# Altium PCB PCB1.PcbDoc
Units mil, origin at the board's own origin, x right, y up, seen from the top; angles counter-clockwise.
Board outline 6000 x 4000 mil, 3 copper layers (Top Layer, PWR, Bottom Layer), stack 19.217 mil thick; 82 components, 43 nets, 260 pads, 0 vias.
Unrouted connection lines stored in the file: 128.
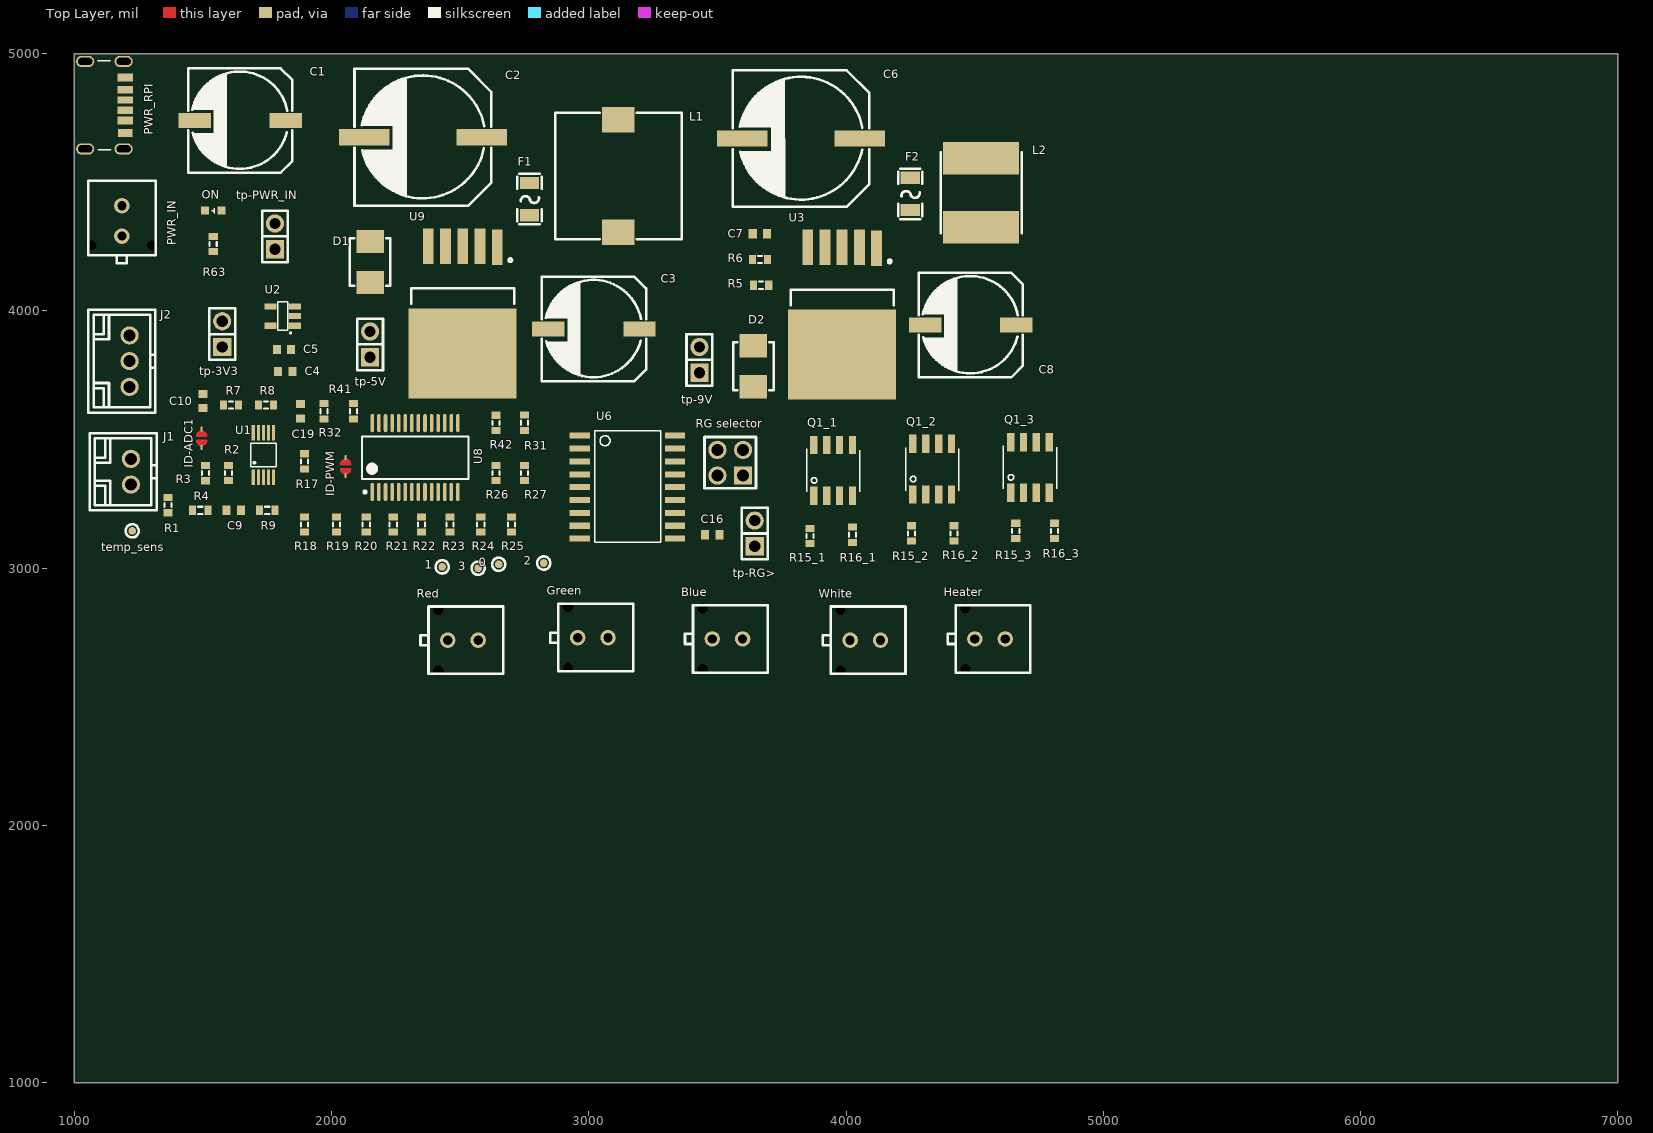
[diagram p0: Top Layer view]
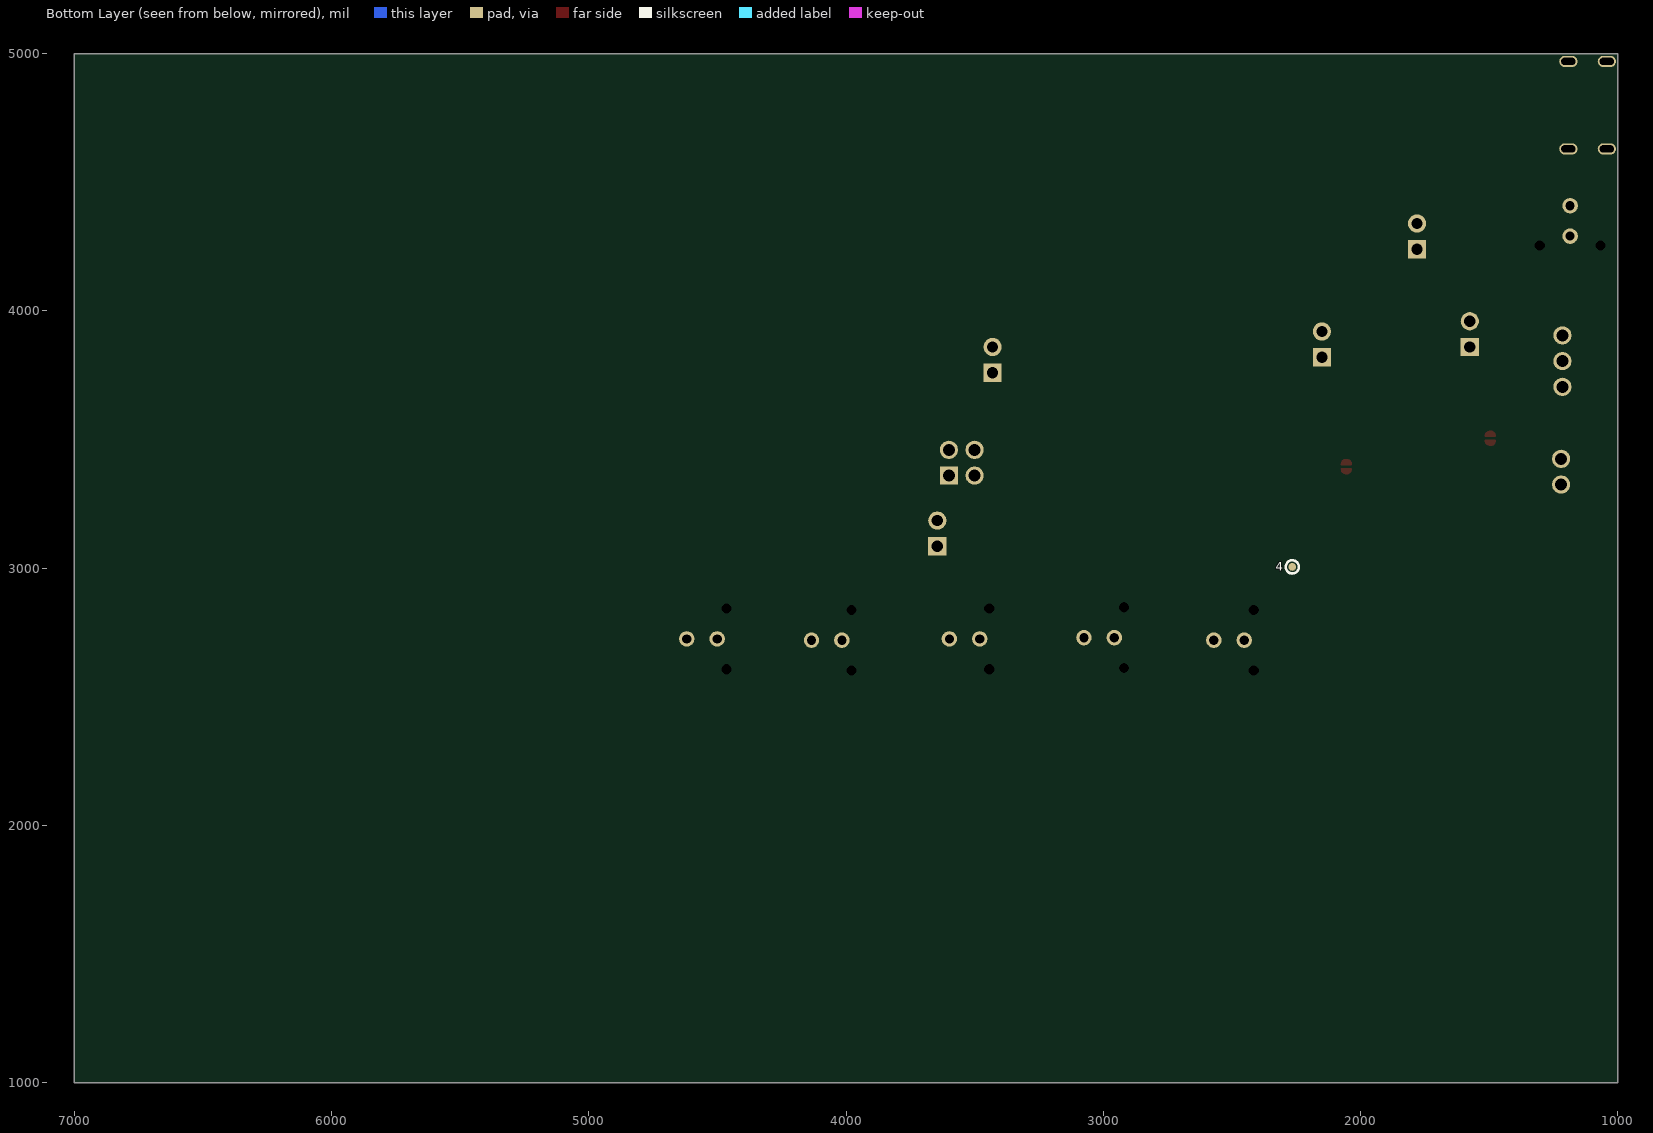
[diagram p1: Bottom Layer view, seen from below]

## Layer stack, top to bottom
Top Solder: solder mask 0.4, Solder Resist, Dk 3.5
Top Layer: signal copper 1.4
Dielectric 1: core 10, FR-4, Dk 4.2
PWR: signal copper 1.417
Dielectric 2: prepreg 5, Dk 4.2
Bottom Layer: signal copper 1.4
Bottom Solder: solder mask 0.4, Solder Resist, Dk 3.5

## Board outline
1000,1000 7000,1000 7000,5000 1000,5000

## Design rules (kind name [scope] priority, off if disabled: settings)
Clearance [All] p1: gap=5 ignorepadtopadclearanceinfootprint=FALSE
HoleSize [All] p1: absolutevalues=TRUE maxlimit=137.79 minlimit=1 maxpercent=80.000 minpercent=20.000
HoleToHoleClearance [All] p1: gap=22 allowstackedmicrovias=TRUE
MinimumSolderMaskSliver [All] p1: minsoldermaskwidth=0
PolygonConnect [All] p1: connectstyle=Relief reliefconductorwidth=10 reliefentries=4 polygonreliefangle="90 Angle" airgapwidth=10
RoomDefinition Step-Down [InComponentClass('Step-Down')] p1: confinementstyle=ConfineOut formatcopy=TRUE lockcomponents=FALSE outline 7045,3835 14720,3835 14720,4620 7045,4620
RoomDefinition Salidas [InComponentClass('Salidas')] p2: confinementstyle=ConfineOut formatcopy=TRUE lockcomponents=FALSE outline 7050,2650 10265,2650 10265,3170 7050,3170
RoomDefinition "Generador PWM" [InComponentClass('Generador PWM')] p3: confinementstyle=ConfineOut formatcopy=TRUE lockcomponents=FALSE outline 7085,3280 12365,3280 12365,3820 7085,3820
RoomDefinition Entradas [InComponentClass('Entradas')] p4: confinementstyle=ConfineOut formatcopy=TRUE lockcomponents=FALSE outline 7045,1435 9550,1435 9550,1965 7045,1965
RoomDefinition Drivers [InComponentClass('Drivers')] p5: confinementstyle=ConfineOut formatcopy=TRUE lockcomponents=FALSE outline 7065,2060 8825,2060 8825,2630 7065,2630
RoomDefinition ADC [InComponentClass('ADC')] p6: confinementstyle=ConfineOut formatcopy=TRUE lockcomponents=FALSE outline 7050,1015 9425,1015 9425,1375 7050,1375
RoomDefinition 3 [InComponentClass('3')] p7: confinementstyle=ConfineOut formatcopy=TRUE lockcomponents=FALSE outline 9435,5250 10360,5250 10360,5650 9435,5650
RoomDefinition 2 [InComponentClass('2')] p8: confinementstyle=ConfineOut formatcopy=TRUE lockcomponents=FALSE outline 7125,5270 8050,5270 8050,5670 7125,5670
RoomDefinition 1 [InComponentClass('1')] p9: confinementstyle=ConfineOut formatcopy=TRUE lockcomponents=FALSE outline 7150,4755 8020,4755 8020,5155 7150,5155
RoutingVias [All] p1: holewidth=28 width=50 viastyle="Through Hole" minholewidth=28 minwidth=50 maxholewidth=28 maxwidth=50
SilkToSilkClearance [All] p1: silktosilkclearance=6
SilkToSolderMaskClearance [IsPad] p1: minsilkscreentomaskgap=0 clearancetoexposedcopper=TRUE
SolderMaskExpansion [All] p1: expansion=4
Width [All] p1: maxlimit=60 minlimit=5 preferedwidth=10
25 further rules are at their usual default settings.

## Classes and differential pairs
component class 1: Q1_1 R15_1 R16_1
component class 2: Q1_2 R15_2 R16_2
component class 3: Q1_3 R15_3 R16_3
component class ADC: C9 C10 ID-ADC1 R2 R3 R4 R7 R8 R9 temp_sens U1
component class Drivers: C16 "RG selector" tp-RG> U6
component class Entradas: C1 J1 J2 PWR_IN R1 tp-PWR_IN
component class "Generador PWM": 0 1 2 3 4 C19 ID-PWM R17 R18 R19 R20 R21 R22 R23 R24 R25 R26 R27 R31 R32 R41 R42 U8
component class Salidas: Blue Green Heater PWR_RPI Red White
component class Step-Down: C2 C3 C4 C5 C6 C7 C8 D1 D2 F1 F2 L1 L2 ON R5 R6 R63 tp-3V3 tp-5V tp-9V U2 U3 U9
channel class HighCurrentDriver: 1 2 3

## Components (designator, comment, footprint, x,y, rotation, side; value= is the part's Value field where it differs from the comment)
0 "TP" TP 2650,3015 r90 top
1 "TP" TP 2430,3005 r90 top
2 "TP" TP 2825,3020 r90 top
3 "TP" TP 2570,3000 r90 top
4 "TP" TP 2265,3005 r90 bottom
Blue "Power connector 2x1" CONN-TH_430450212 3539.06,2725 r0 top
C1 "Cap pol" CAP_SMD_Electrolytic_10x10 1645,4740 r180 top value=47uF
C2 "Cap pol" CAP_SMD_Electrolytic_13.5x13.5 2355,4675 r180 top value=680uF
C3 "Cap pol" CAP_SMD_Electrolytic_10x10 3020,3930 r180 top value=330uF
C4 "Cap Semi" 1608[0603] 1820,3765 r0 top value=1uF
C5 "Cap Semi" 1608[0603] 1815,3850 r0 top value=1uF
C6 "Cap pol" CAP_SMD_Electrolytic_13.5x13.5 3825,4670 r180 top value=680uF
C7 "Cap Semi" 1608[0603] 3665,4300 r0 top value=1.5nF
C8 "Cap pol" CAP_SMD_Electrolytic_10x10 4485,3945 r180 top value=330uF
C9 "Cap Semi" 1608[0603] 1620,3225 r0 top value=100nF
C10 "Cap Semi" 1608[0603] 1500,3650 r90 top value=100nF
C16 "Cap Semi" 1608[0603] 3480,3130 r180 top value=1uF
C19 "Cap Semi" 1608[0603] 1880,3610 r90 top value=10uF
D1 "Schottky Diode" SMB_L4.6-W3.6-LS5.3-RD 2150,4190 r90 top
D2 "Schottky Diode" SMB_L4.6-W3.6-LS5.3-RD 3640,3785 r90 top
F1 "Generic Fuse" F1206 2770,4435 r90 top
F2 "Generic Fuse" F1206 4250,4455 r90 top
Green "Power connector 2x1" CONN-TH_430450212 3015.94,2730 r0 top
Heater "Power connector 2x1" CONN-TH_430450212 4560,2725 r0 top
ID-ADC1 "sj" SJ2 1495,3505 r90 top
ID-PWM "sj" SJ2 2055,3395 r90 top
J1 "Generic header 2x1" CONN-TH_A2547WV-2P 1204.25,3374.02 r270 top
J2 "Generic Header 3x1" CONN-TH_A2547WV-3P 1215,3805 r270 top
L1 "Inductor" IND-SMD_L12.5-W12.5_SMDRS1275 3115,4525 r90 top value=33uH
L2 "Inductor" IND-SMD_L8.0-W8.0 4525,4460 r90 top value=15uH
ON "Generic LED" LED0603 1540,4390 r0 top
PWR_IN "Power connector 2x1" CONN-TH_430450212 1185,4350 r90 top
PWR_RPI "USB-C female 6" "USB-C_SMD 6 contacts" 1120,4800 r0 top
Q1_1 "IRF7401PbF-1" SOIC8 3950,3380 r0 top (schematic designator Q1)
Q1_2 "IRF7401PbF-1" SOIC8 4335,3385 r0 top (schematic designator Q1)
Q1_3 "IRF7401PbF-1" SOIC8 4715,3391.57 r0 top (schematic designator Q1)
R1 "Res3" J1-0603 1365,3245 r90 top value=10K
R2 "Res3" J1-0603 1600,3370 r90 top value=2K
R3 "Res3" J1-0603 1510,3369.53 r90 top value=10K
R4 "Res3" J1-0603 1489.53,3225 r0 top value=2K
R5 "Res3" J1-0603 3670,4100 r0 top value=1K
R6 "Res3" J1-0603 3665.47,4200 r0 top value=6.34K
R7 "Res3" J1-0603 1609.53,3635 r0 top value=10K
R8 "Res3" J1-0603 1745,3635 r0 top value=10K
R9 "Res3" J1-0603 1750,3225 r0 top value=220
R15_1 "Res3" J1-0603 3860,3125 r90 top value=110 (schematic designator R15)
R15_2 "Res3" J1-0603 4255,3135.47 r90 top value=110 (schematic designator R15)
R15_3 "Res3" J1-0603 4660,3145 r90 top value=110 (schematic designator R15)
R16_1 "Res3" J1-0603 4025,3130 r90 top value=10K (schematic designator R16)
R16_2 "Res3" J1-0603 4420,3135.47 r90 top value=10K (schematic designator R16)
R16_3 "Res3" J1-0603 4810,3145 r90 top value=10K (schematic designator R16)
R17 "Res3" J1-0603 1895,3415.47 r90 top value=2K
R18 "Res3" J1-0603 1895,3170 r90 top value=10K
R19 "Res3" J1-0603 2020,3170 r90 top value=10K
R20 "Res3" J1-0603 2135,3170 r90 top value=2K
R21 "Res3" J1-0603 2240,3170 r90 top value=2K
R22 "Res3" J1-0603 2350,3170 r90 top value=2K
R23 "Res3" J1-0603 2460,3170 r90 top value=220
R24 "Res3" J1-0603 2580,3170 r90 top value=220
R25 "Res3" J1-0603 2700,3170 r90 top value=220
R26 "Res3" J1-0603 2640,3370 r90 top value=220
R27 "Res3" J1-0603 2750,3370 r90 top value=220
R31 "Res3" J1-0603 2750,3565.47 r90 top value=2K
R32 "Res3" J1-0603 1970,3610 r90 top value=2K
R41 "Res3" J1-0603 2085,3610 r90 top value=10K
R42 "Res3" J1-0603 2640,3565 r90 top value=10K
R63 "Res3" J1-0603 1540,4260 r90 top value=442
Red "Power connector 2x1" CONN-TH_430450212 2510.94,2720 r0 top
"RG selector" "Pin Header 2x2c" HDR-TH_4P-P2.54-V-R2-C2-S2.54_A2541WV-2X2P 3550,3410 r90 top
temp_sens "TP" TP 1225,3145 r90 top (schematic designator temp_sens1)
tp-3V3 "Pin Header 2x1" HDR-TH_P2.54-H-M_A2541WV-2P 1575,3910 r90 top
tp-5V "Pin Header 2x1" HDR-TH_P2.54-H-M_A2541WV-2P 2150,3870 r90 top
tp-9V "Pin Header 2x1" HDR-TH_P2.54-H-M_A2541WV-2P 3430,3810 r90 top
tp-PWR_IN "Pin Header 2x1" HDR-TH_P2.54-H-M_A2541WV-2P 1780,4290 r90 top
tp-RG> "Pin Header 2x1" HDR-TH_P2.54-H-M_A2541WV-2P 3645,3135 r90 top
U1 "ADS1115" "VSSOP - 10" 1735,3440 r0 top
U2 "AP2112K-3.3TRG1" SOT25-5 1810,3980 r270 top
U3 "LM2596-ADJ" TO-263-5 3985,4038.66 r90 top
U6 "ULN2803A" SOIC18 2964.92,3515 r0 top
U8 "PCA9685" SSOP-28_L 2325,3430 r90 top
U9 "LM2596-5V" TO-263-5 2510,4043.66 r90 top
White "Power connector 2x1" CONN-TH_430450212 4075,2720 r0 top

## Footprints (in the part's own frame and the unit in brackets; to place one, negate y for a bottom-side part, rotate by r counter-clockwise, add the part's x,y. Pads: shape width x height; smd on the part's side, far side on the other; paste and mask are expansions set on the pad)
1608[0603] [mm] "Chip Capacitor, Body 1.6x0.8mm, IPC High Density"
  rect 0.8x0.9 smd: 1(-0.7,0) 2(0.7,0)
  body extent -0.87,-0.48 0.87,0.48, height 1.3
CAP_SMD_Electrolytic_10x10 [mm]
  rect 3.2x1.5 smd: 1(4.5,0) 2(-4.5,0)
  silkscreen extent -5.15,-5.15 5.15,5.15, body extent -6,-5.25 6,5.25, height 10.5
CAP_SMD_Electrolytic_13.5x13.5 [mm]
  rect 5x1.6 smd: 1(5.8,0) 2(-5.8,0)
  silkscreen extent -6.75,-6.75 6.75,6.75, body extent -7.35,-6.75 7.55,6.75, height 13.5
CONN-TH_430450212 [mm]
  round 1.524 hole 0.914: 1(-1.5,0) 2(1.5,0)
  round 0.5 hole 1: 3(-2.44,3) 4(-2.44,-3)
  silkscreen extent -4.19,-3.32 3.97,3.32, body extent -4.73,-3.6 4.03,3.55, height 9.95
CONN-TH_A2547WV-2P [mm]
  round 1.8 hole 1.2: 1(-1.295,0.4) 2(1.245,0.4)
  silkscreen extent -3.84,-3.66 3.78,2.94, body extent -3.71,-3.71 3.66,2.89, height 11.81
CONN-TH_A2547WV-3P [mm]
  round 1.8 hole 1.2: 1(-2.54,0) 2(0,0) 3(2.54,0)
  silkscreen extent -5.08,-4.07 5.08,2.54, body extent -5.08,-4.04 5.08,2.56, height 11.81
F1206 [mm]
  rect 1.2x1.9 smd: 1(-1.6,0) 2(1.6,0)
  silkscreen extent -2.5,-1.2 2.5,1.2, body extent -1.7,-0.89 1.7,0.89, height 0.84
HDR-TH_4P-P2.54-V-R2-C2-S2.54_A2541WV-2X2P [mm]
  rect 1.8x1.8 hole 1.2: 1(-1.27,-1.27)
  round 1.8 hole 1.2: 2(-1.27,1.27) 3(1.27,-1.27) 4(1.27,1.27)
  silkscreen extent -2.54,-2.54 2.54,2.54, body extent -2.54,-2.5 2.54,2.5, height 8.6
HDR-TH_P2.54-H-M_A2541WV-2P [mm]
  rect 1.8x1.8 hole 1.1: 1(-1.27,0)
  round 1.8 hole 1.1: 2(1.27,0)
  silkscreen extent -2.54,-1.27 2.54,1.27, body extent -2.46,-1.16 2.62,1.24, height 8.36
IND-SMD_L8.0-W8.0 [mm]
  rect 3.2x7.5 smd: 1(-3.4,0) 2(3.4,0)
  silkscreen extent -4,-4 4,4, body extent -4.1,-4 3.9,4, height 4
IND-SMD_L12.5-W12.5_SMDRS1275 [mm]
  rect 2.5x3.2 smd: 1(-5.55,0) 2(5.55,0)
  silkscreen extent -6.25,-6.25 6.25,6.25, body extent -6.25,-6.25 6.25,6.25, height 7.8
J1-0603 [mm] "Chip Resistor, Body 1.6x0.8mm, IPC High Density"
  rect 0.7x0.9 smd: 1(-0.75,0) 2(0.75,0)
  silkscreen extent -0.2,-0.35 0.2,0.35, body extent -0.85,-0.48 0.85,0.48, height 0.9
LED0603 [mm] "LED 0603"
  rect 0.8x0.8 smd: 1(-0.8,0) 2(0.8,0)
  silkscreen extent -0.13,-0.25 0.13,0.25, body extent -0.8,-0.4 0.8,0.4, height 0.4
SJ2 [mm]
  oval 0.5x0.2 smd: 1(-0.9,0) 2(0.9,0)
  Top Layer region: -0.238,-0.491 -0.455,-0.442 -0.629,-0.303 -0.726,-0.103 -0.726,0.12 -0.629,0.32 -0.455,0.459 -0.238,0.509 -0.238,0.509
  Top Layer region: 0.2,-0.5 0.417,-0.45 0.591,-0.312 0.687,-0.111 0.687,0.111 0.591,0.312 0.417,0.45 0.2,0.5 0.2,0.5
  Top Layer lines w0.127: -0.2,0.5 ccw(c-0.2,0) -0.2,-0.5 -0.2,0.5 ; 0.2,0.5 cw(c0.2,0) 0.2,-0.5 0.2,0.5
SMB_L4.6-W3.6-LS5.3-RD [mm]
  rect 2.29x2.72 smd: 1(-2.025,0) 2(2.025,0)
  silkscreen extent -2.35,-2 2.35,2, body extent -2.79,-1.97 2.8,1.97, height 2.5
SOIC8 [mm]
  rect 0.72x1.8 smd: 1(-1.905,-2.5) 2(-0.635,-2.5) 3(0.635,-2.5) 4(1.905,-2.5) 5(1.905,2.5) 6(0.635,2.5) 7(-0.635,2.5) 8(-1.905,2.5)
  silkscreen extent -2.63,-2.12 2.63,2.12, body extent -2.5,-3.08 2.5,3.08, height 2
SOIC18 [mm]
  rect 2x0.6 smd: 1(0,0) 2(0,-1.27) 3(0,-2.54) 4(0,-3.81) 5(0,-5.08) 6(0,-6.35) 7(0,-7.62) 8(0,-8.89) 9(0,-10.16) 10(9.4,-10.16) 11(9.4,-8.89) 12(9.4,-7.62) 13(9.4,-6.35) 14(9.4,-5.08) 15(9.4,-3.81) 16(9.4,-2.54) 17(9.4,-1.27) 18(9.4,0)
  silkscreen extent 1.5,-10.5 8,0.5, body extent -0.48,-10.88 9.83,0.68, height 2.64
SOT25-5 [mm]
  rect 0.6x1.2 smd: 1(0.95,1.2) 2(0,1.2) 3(-0.95,1.2) 4(-0.95,-1.2) 5(0.95,-1.2)
  silkscreen extent -1.4,-0.5 1.68,0.81, body extent -1.55,-1.47 1.55,1.53, height 1.45
SSOP-28_L [mm] "SOP, 28-Leads, Body 10.2x5.3mm, Pitch 0.65mm, IPC High Density"
  oval 1.8x0.35 smd: 1(-3.4,4.225) 2(-3.4,3.575) 3(-3.4,2.925) 4(-3.4,2.275) 5(-3.4,1.625) 6(-3.4,0.975) 7(-3.4,0.325) 8(-3.4,-0.325) 9(-3.4,-0.975) 10(-3.4,-1.625) 11(-3.4,-2.275) 12(-3.4,-2.925) 13(-3.4,-3.575) 14(-3.4,-4.225) 15(3.4,-4.225) 16(3.4,-3.575) 17(3.4,-2.925) 18(3.4,-2.275) 19(3.4,-1.625) 20(3.4,-0.975) 21(3.4,-0.325) 22(3.4,0.325) 23(3.4,0.975) 24(3.4,1.625) 25(3.4,2.275) 26(3.4,2.925) 27(3.4,3.575) 28(3.4,4.225)
  silkscreen extent -3.52,-5.25 2.1,5.25, body extent -2.8,-5.25 2.8,5.25, height 2
TO-263-5 [mm]
  rect 3.5x1.069 smd: 1(5.2,-3.404) 2(5.3,-1.702) 3(5.3,0) 4(5.3,1.702) 5(5.3,3.404)
  rect 8.89x10.66 smd: 6(-5.3,0)
  silkscreen extent -0.41,-5.08 4.07,5.08, body extent -8.55,-5.1 5.8,5.08, height 4.58
TP [mil]
  round 30 smd: 1(0,0)
  silkscreen extent -26,-26 26,25
"USB-C_SMD 6 contacts" [mm]
  oval 1.8x1.1 hole 0.7 slot 1.401 at 0 deg: 1(-1.975,4.32) 2(1.825,4.32) 3(-1.975,-4.32) 4(1.825,-4.32)
  rect 1.5x0.7 smd: A5(1.975,0.5) B5(1.975,-0.5)
  rect 1.5x0.76 smd: A9(1.975,-1.52) B9(1.975,1.52)
  rect 1.4x0.8 smd: A12(1.975,-2.75)
  rect 1.5x0.8 smd: B12(1.975,2.75)
  silkscreen extent -0.72,-4.4 0.56,4.4
"VSSOP - 10" [mm] "DGSM-10"
  rect 0.3x1.5 smd: 1(-1,-2.2) 2(-0.5,-2.2) 3(0,-2.2) 4(0.5,-2.2) 5(1,-2.2) 6(1,2.2) 7(0.5,2.2) 8(0,2.2) 9(-0.5,2.2) 10(-1,2.2)
  silkscreen extent -1.27,-1.14 1.27,1.14, body extent -1.5,-2.45 1.5,2.45, height 1.1

## Part data
0 1 2 3 4 temp_sens: "Solder test point"
Blue Green Heater PWR_IN Red White: library part "PC - 2X1", "Generic Header Power 2pos", Manufacturer=MOLEX, Manufacturer Part Number=430450212, Supplier Part Number 1=C293362, Supplier 1=LCSC
C1: "Electrolytic Aluminium Capacitor", Manufacturer=Lelon, Manufacturer Part Number=VEJ470M1HTR-1010, Package=SMD,10x10mm, Supplier Part Number 1=C249662, Voltage=50V, Supplier 1=LCSC
C2 C6: "Electrolytic Aluminium Capacitor", Manufacturer=PANASONIC, Manufacturer Part Number=EEEFK1V681AQ, Package=SMD,12.5x13.5mm, Supplier Part Number 1=C178568, Voltage=35V, Supplier 1=LCSC
C3 C8: "Electrolytic Aluminium Capacitor", Manufacturer=PANASONIC, Manufacturer Part Number=EEE1VA331UAP, Package="SMD, 10X10mm", Supplier Part Number 1=C336488, Voltage=35V, Supplier 1=LCSC
C4 C5: "Capacitor (Semiconductor SIM Model)", Manufacturer="Samsung Electro-Mechanics", Manufacturer Part Number=CL10B105KO8NNNC, Supplier Part Number 1=C59782, LatestRevisionDate=29-May-2009, LatestRevisionNote="IPC-7351 Footprint Added.", PackageDescription="Chip Capacitor", PackageReference=C0603, Published=8-Jun-2000, Publisher="Altium Limited", Supplier 1=LCSC
C7: "Capacitor (Semiconductor SIM Model)", Manufacturer="Walsin Tech Corp", Manufacturer Part Number=0603B152K500, Supplier Part Number 1=C152947, LatestRevisionDate=29-May-2009, LatestRevisionNote="IPC-7351 Footprint Added.", PackageDescription="Chip Capacitor", PackageReference=C0603, Published=8-Jun-2000, Publisher="Altium Limited", Supplier 1=LCSC
C9 C10: "Capacitor (Semiconductor SIM Model)", Manufacturer="Taiyo Yuden", Manufacturer Part Number=UMK107B104KAHT, Supplier Part Number 1=C386152, LatestRevisionDate=29-May-2009, LatestRevisionNote="IPC-7351 Footprint Added.", PackageDescription="Chip Capacitor", PackageReference=C0603, Published=8-Jun-2000, Publisher="Altium Limited", Supplier 1=LCSC
C16: "Capacitor (Semiconductor SIM Model)", Manufacturer="Samsung Electro-Mechanics", Manufacturer Part Number=CL10A105KB8NNNC, Supplier Part Number 1=C15849, LatestRevisionDate=29-May-2009, LatestRevisionNote="IPC-7351 Footprint Added.", PackageDescription="Chip Capacitor", PackageReference=C0603, Published=8-Jun-2000, Publisher="Altium Limited", Supplier 1=LCSC
C19: "Capacitor (Semiconductor SIM Model)", Manufacturer="Samsung Electro-Mechanics", Manufacturer Part Number=CL10A106MQ8NNNC, Supplier Part Number 1=C1691, LatestRevisionDate=29-May-2009, LatestRevisionNote="IPC-7351 Footprint Added.", PackageDescription="Chip Capacitor", PackageReference=C1206, Published=8-Jun-2000, Publisher="Altium Limited", Supplier 1=LCSC
D1 D2: "Schottky Diodes", Manufacturer="MCC(Micro Commercial Components)", Manufacturer Part Number=SK32B-LTP, Package=SMB, Reverse voltage=20V, Supplier Part Number 1=C139945, Supplier 1=LCSC
F1 F2: library part FUSE, "SMD Fuse", Current Rating=4.5A, Manufacturer=AEM, Manufacturer Part Number=F1206VH4500TM, Package=1206, Rated Voltage AC=65V, Supplier Part Number 1=C310980, Supplier 1=LCSC
ID-ADC1 ID-PWM: library part Jumper, "solder jumper generic"
J1: library part "Header - 2x1", "Generic Header 2pos, 1 row, 2.54 pitch", Manufacturer="CJT(Changjiang Connectors)", Manufacturer Part Number=A2547WV-2P, Package="Through Hole,P=2.54mm", Supplier Part Number 1=C239377, Pitch=2.54mm, Supplier 1=LCSC
J2: library part "Header - 3x1", "Generic Header 3pos, 1 row, 2.54 pitch", Manufacturer="CJT(Changjiang Connectors)", Manufacturer Part Number=A2547WV-3P, Package="Through Hole,P=2.54mm", Supplier Part Number 1=C239378, Pitch=2.54, Supplier 1=LCSC
L1: "Inductor SMD", Manufacturer=GLE, Manufacturer Part Number=GCRH127M-330MC, Package=SMD,12.3x12.3x8mm, Supplier Part Number 1=C439422, Supplier 1=LCSC
L2: "Inductor SMD", Manufacturer="3L COILS", Manufacturer Part Number=SNR8040K-150M, Package=SMD,8.0x8.0mm, Supplier Part Number 1=C326353, Supplier 1=LCSC
ON: library part LED, "Generic LED SMD", Color=Green, Manufacturer=TOGIALED, Manufacturer Part Number=TJ-S1608SW6TGLC2G-A5, Package=0603, Supplier Part Number 1=C192316, Supplier 1=LCSC
PWR_RPI: "USB - Type C Female 6 USB Connectors RoHS", Manufacturer="Korean Hroparts Elec", Manufacturer Part Number=TYPE-C-31-M-17, Supplier Part Number 1=C283540, Supplier 1=LCSC
Q1_1 Q1_2 Q1_3: library part IRF7401, "MOSFET N Channel 20V 8.7A 700mV @ 250uA 22mO @ 4.1A,4.5V SOIC-8_150mil RoHS", Manufacturer="Infineon Technologies", Manufacturer Part Number=IRF7401TRPBF, Package=SO-8, Supplier Part Number 1=C169092, Supplier 1=LCSC
R1 R3 R7 R8 R16_1 R16_2 R16_3 R18 R19 R41 R42: "Resistor", Manufacturer=PANASONIC, Manufacturer Part Number=ERJPA3F1002V, Supplier Part Number 1=C441927, LatestRevisionDate=29-May-2009, LatestRevisionNote="IPC-7351 Footprint Added.", PackageDescription="Chip Resistor", PackageReference=J1-0603, Published=8-Jun-2000, Publisher="Altium Limited", Supplier 1=LCSC
R2 R4 R17 R20 R21 R22 R31 R32: "Resistor", Manufacturer=YAGEO, Manufacturer Part Number=RC0603FR-072KL, Supplier Part Number 1=C105576, LatestRevisionDate=29-May-2009, LatestRevisionNote="IPC-7351 Footprint Added.", PackageDescription="Chip Resistor", PackageReference=J1-0603, Published=8-Jun-2000, Publisher="Altium Limited", Supplier 1=LCSC
R5: "Resistor", Manufacturer=KAMAYA, Manufacturer Part Number=RMC16K102FTP, Supplier Part Number 1=C323557, LatestRevisionDate=29-May-2009, LatestRevisionNote="IPC-7351 Footprint Added.", PackageDescription="Chip Resistor", PackageReference=J1-0603, Published=8-Jun-2000, Publisher="Altium Limited", Supplier 1=LCSC
R6: "Resistor", Manufacturer=YAGEO, Manufacturer Part Number=RC0603FR-076K34L, Supplier Part Number 1=C185314, LatestRevisionDate=29-May-2009, LatestRevisionNote="IPC-7351 Footprint Added.", PackageDescription="Chip Resistor", PackageReference=J1-0603, Published=8-Jun-2000, Publisher="Altium Limited", Supplier 1=LCSC
R9 R23 R24 R25 R26 R27: "Resistor", Manufacturer=YAGEO, Manufacturer Part Number=RC0603FR-07220RL, Supplier Part Number 1=C107696, LatestRevisionDate=29-May-2009, LatestRevisionNote="IPC-7351 Footprint Added.", PackageDescription="Chip Resistor", PackageReference=J1-0603, Published=8-Jun-2000, Publisher="Altium Limited", Supplier 1=LCSC
R15_1 R15_2 R15_3: "Resistor", Manufacturer="ROHM Semicon", Manufacturer Part Number=MCR03EZPFX1100, Supplier Part Number 1=C308180, LatestRevisionDate=29-May-2009, LatestRevisionNote="IPC-7351 Footprint Added.", PackageDescription="Chip Resistor", PackageReference=J1-0603, Published=8-Jun-2000, Publisher="Altium Limited", Supplier 1=LCSC
R63: "Resistor", Manufacturer=YAGEO, Manufacturer Part Number=AC0603FR-07442RL, Supplier Part Number 1=C227905, LatestRevisionDate=29-May-2009, LatestRevisionNote="IPC-7351 Footprint Added.", PackageDescription="Chip Resistor", PackageReference=J1-0603, Published=8-Jun-2000, Publisher="Altium Limited", Supplier 1=LCSC
"RG selector": library part "Header - 2x2c", "Pin Header 4pos, 2 row, 2.54 pitch", Manufacturer="CJT(Changjiang Connectors)", Manufacturer Part Number=A2541WV-2x2P, Supplier Part Number 1=C225517, Pitch=2.54, Supplier 1=LCSC
tp-3V3 tp-5V tp-9V tp-PWR_IN tp-RG>: library part "Header - 2x1c", "Pin Header 2pos, 1 row, 2.54 pitch", Manufacturer="CJT(Changjiang Connectors)", Manufacturer Part Number=A2541WV-2P, Supplier Part Number 1=C225477, Pitch=2.54, Supplier 1=LCSC
U1: library part ADS1115QDGSRQ1, "Analog To Digital Converters (ADCs) VSSOP-10 RoHS", Manufacturer="Texas Instruments", Package=VSSOP-10, Supplier Part Number 1=C172375, Manufacturer Part Number=ADS1115QDGSRQ1, Supplier 1=LCSC
U2: library part AP2112K-3.3, "600mA CMOS LDO REGULATOR WITH ENABLE", Manufacturer=DIODES, Package=SOT-25-5_L3.0-W1.8-P0.95-LS3.0-BL, Supplier Part Number 1=C51118, Manufacturer Part Number=AP2112K-3.3TRG1, Supplier 1=LCSC
U3: "DC-DC Converters Step-Down Adjustable 1 4.5V 40V 1.2V 37V 3A TO-263-5 RoHS", Manufacturer="Texas Instruments", Manufacturer Part Number=LM2596SX-ADJ/NOPB, Package=TO-263-5, Supplier Part Number 1=C29781, Supplier 1=LCSC
U6: library part ULN2803, "Darlington transistor array driver SOIC-18_300mi", Manufacturer="Texas instrument", Manufacturer Part Number=ULN2803ADWR, Package=SOIC-18_300mil, Supplier Part Number 1=C9683, Supplier 1=LCSC
U8: "LED Drivers,16CH, I2C, TSSOP-28", Manufacturer="NXP Semicon", Manufacturer Part Number=PCA9685PW/Q900,118, Package=TSSOP-28, Supplier Part Number 1=C92206, Supplier 1=LCSC
U9: "Step-Down Positive Fixed 1 3A 150kHz TO-263-5 DC-DC Converters RoHS", Manufacturer="HTC Korea TAEJIN Tech", Manufacturer Part Number=LM2596R-5.0, Package=TO-263-5, Supplier Part Number 1=C77782, Supplier 1=LCSC

## Nets (pads, with @x,y where several pads share a name; then routed paths per layer and width w, separated by ;. In a path a pad name is that pad's centre, name@x,y a point inside that pad or via, vN(x,y) a via of type N, cw(c..) or ccw(c..) an arc to the next point about the centre after c; other vN are vias at no path point)
+3V3: C5.2 C10.2 C19.2 R2.1 R4.1 R7.2 R8.2 R17.1 R20.1 R21.1 R22.1 R31.1 R32.1 tp-3V3.1 U1.8 U2.5 U8.28
+5V: C3.2 C4.2 L1.2 PWR_RPI.A9 PWR_RPI.B9 R1.2 tp-5V.1 U2.1 U2.3 U9.4
+9V: "RG selector.1" C7.2 C8.2 L2.2 R6.2 tp-9V.1
addr_ads1115: ID-ADC1.2 R2.2 U1.1
addr_pca9685_a0: ID-PWM.2 R18.2 U8.1
CH_0: Red.2 U6.18
CH_1: Green.2 U6.17
CH_2: Q1_2.5 Q1_2.6 Q1_2.7 Q1_2.8 White.2
CH_3: Heater.2 Q1_3.5 Q1_3.6 Q1_3.7 Q1_3.8
GND: C2.1 C3.1 C4.1 C5.1 C6.1 C8.1 D1.1 D2.1 ON.2 R5.1 tp-3V3.2 tp-5V.2 tp-9V.2 U2.2 U3.3 U3.5 U3.6 U9.3 U9.5 U9.6
NetC7_1: C7.1 R5.2 R6.1 U3.4
NetD1_2: D1.2 L1.1 U9.2
NetD2_2: D2.2 L2.1 U3.2
NetF1_2: F1.2 U9.1
NetF2_2: F2.2 U3.1
NetID-ADC1_1: ID-ADC1.1 R3.2
NetID-PWM_1: ID-PWM.1 R17.2
NetON_1: ON.1 R63.1
NetQ1_1_4: Q1_1.4 R15_1.2 R16_1.2
NetQ1_2_4: Q1_2.4 R15_2.2 R16_2.2
NetQ1_3_4: Q1_3.4 R15_3.2 R16_3.2
NetR4_2: R4.2 U1.2
NetR9_2: R9.2 U1.4
NetR19_2: R19.2 U8.2
NetR20_2: R20.2 U8.3
NetR21_2: R21.2 U8.4
NetR22_2: R22.2 U8.5
NetR23_2: R23.2 U8.6
NetR24_2: R24.2 U8.7
NetR25_2: R25.2 U8.8
NetR26_2: R26.2 U8.9
NetR27_2: R27.2 U8.10
NetR41_2: R41.2 U8.24
NetR42_2: R42.2 U8.23
PWM_0: 0.1 R23.1 U6.1
PWM_1: 2.1 R15_1.1 R25.1
PWM_2: 3.1 R15_2.1 R26.1
PWM_3: 4.1 R15_3.1 R27.1
SCL_BUS: R32.2 U8.26
SDA_BUS: J2.2 R8.1 R31.2 U1.9 U8.27
tempSens: C9.2 J1.1 R1.1 R9.1 temp_sens.1
V_PWR: "RG selector.2" Blue.1 C1.2 C2.2 C6.2 F1.1 F2.1 Heater.1 PWR_IN.1 R63.2 tp-PWR_IN.1 White.1
VCC_low: "RG selector.3" "RG selector.4" C16.1 Green.1 Red.1 tp-RG>.1 U6.10
pads on no net: 1.1 Blue.2 Blue.3 Blue.4 C1.1 C9.1 C10.1 C16.2 C19.1 Green.3 Green.4 Heater.3 Heater.4 J1.2 J2.1 J2.3 PWR_IN.2 PWR_IN.3 PWR_IN.4 PWR_RPI.1 PWR_RPI.2 PWR_RPI.3 PWR_RPI.4 PWR_RPI.A5 PWR_RPI.A12 PWR_RPI.B5 PWR_RPI.B12 Q1_1.1 Q1_1.2 Q1_1.3 Q1_1.5 Q1_1.6 Q1_1.7 Q1_1.8 Q1_2.1 Q1_2.2 Q1_2.3 Q1_3.1 Q1_3.2 Q1_3.3 R3.1 R7.1 R16_1.1 R16_2.1 R16_3.1 R18.1 R19.1 R24.1 R41.1 R42.1 Red.3 Red.4 tp-PWR_IN.2 tp-RG>.2 U1.3 U1.5 U1.6 U1.7 U1.10 U2.4 U6.2 U6.3 U6.4 U6.5 U6.6 U6.7 U6.8 U6.9 U6.11 U6.12 U6.13 U6.14 U6.15 U6.16 U8.11 U8.12 U8.13 U8.14 U8.15 U8.16 U8.17 U8.18 U8.19 U8.20 U8.21 U8.22 U8.25 White.3 White.4

## Silkscreen, mask and mechanical layers (free items; w line width, h text height)
Top Overlay:
  text "FluOpti" at -1365,1050 h200 r90

## Dimensions
1005,5005 to 4860,5095 on Top Layer